# EAGLE board v2_dashbutton_round (EAGLE 9.1.3)
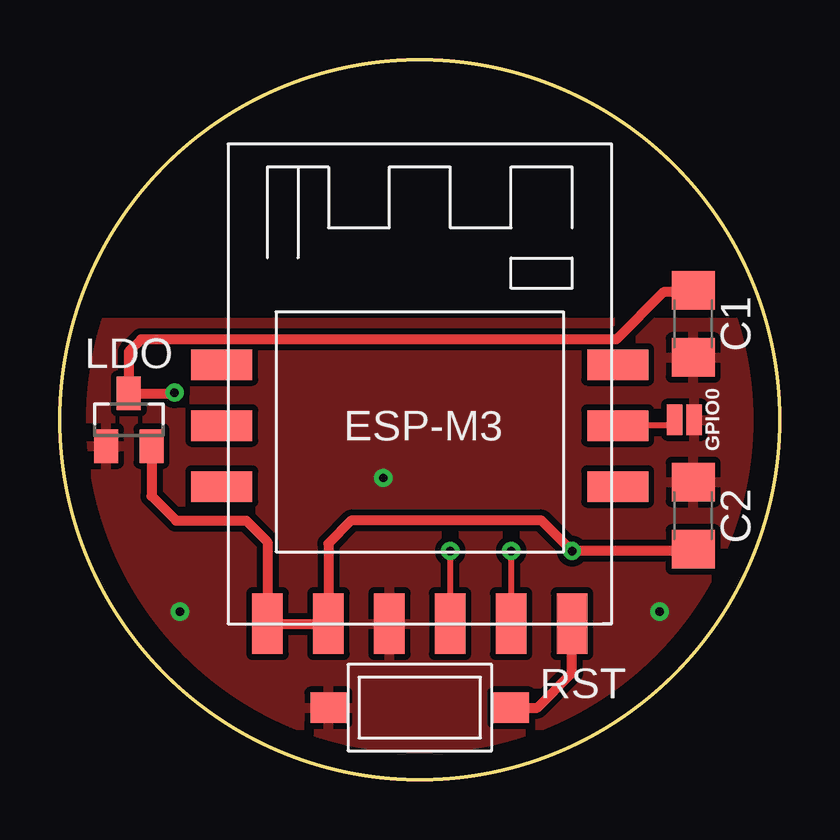
[diagram p0: board, top side]
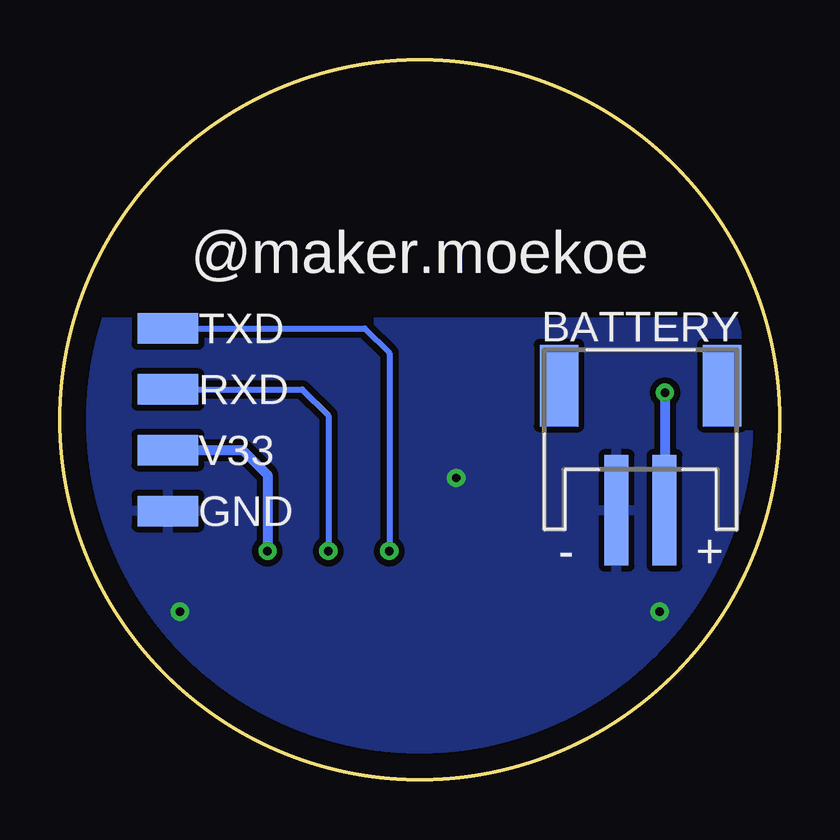
[diagram p1: board, bottom side, seen from below]

Size 30 x 30 mm. Coordinates in mm from the lower left corner, seen from the top.
Outline: circle at 15,15 radius 15
Copper layers (1*16): Top 0.035mm / dielectric 1.5mm / Bottom 0.035mm
Design rules "default": minimum track width 6mil, minimum drill 0.35mm, track to track 6mil, track to pad 6mil, pad to pad 6mil, via to via 6mil, smd to smd 6mil, copper to edge 40mil, drill to drill 6mil, minimum pad ring 10mil, minimum via ring 8mil, stop-mask expansion 4mil, vias tented up to drill 0mil, thermal gap 10mil

## Footprints (pad centres in the part's own frame; a part is rotated, then mirrored left to right if it is on the bottom)
JST-PH-2-SMT-RA = smd 1 x 4.6: 1 1,-3.7; 2 -1,-3.7 | smd 1.6 x 3.4: NC1 -3.4,1.5; NC2 3.4,1.5
C1206 = smd 1.6 x 1.8: 1 -1.4,0; 2 1.4,0
SMD1,27-2,54 = smd 1.27 x 2.54: 1 0,0
SMT-JUMPER_2_NO_NO-SILK = smd 0.635 x 1.27: 1 -0.406,0; 2 0.406,0
SOT23 = smd 1 x 1.4: 1 -0.95,-1.1; 2 0.95,-1.1; 3 0,1.1
6X3BUTTON = smd 1.5 x 1.27: P1 -3.81,0; P2 3.81,0
ESP8285 = smd 1.27 x 2.54: EN -6.35,0; GND -1.27,0; RST 6.35,0; RXD 3.81,0; TXD 1.27,0; VCC -3.81,0 | smd 2.54 x 1.27: GPIO0 8.255,8.255; GPIO2 8.255,5.715; GPIO4 8.255,10.795; GPIO13 -8.255,5.715; GPIO14 -8.255,8.255; GPIO16 -8.255,10.795

## Placement (x,y rotation side)
BATTERY  [JST-PH-2-SMT-RA]  5.79,14.92 0 bottom
C1  1u  [C1206]  26.4,19 270 top
C2  1u  [C1206]  26.4,11 90 top
GND  [SMD1,27-2,54]  25.5,11.19 270 bottom
GPIO0  [SMT-JUMPER_2_NO_NO-SILK]  26.04,15 0 top
LDO  MCP1700  [SOT23]  2.87,15 0 top
RST  6X3_SMD_BUTTON_HALF  [6X3BUTTON]  15,3 180 top
RXD  [SMD1,27-2,54]  25.5,16.27 270 bottom
TXD  [SMD1,27-2,54]  25.5,18.81 270 bottom
U$1  ESP8285-M3  [ESP8285]  15,6.5 0 top
V33  [SMD1,27-2,54]  25.5,13.73 270 bottom

## Library data of the parts
BATTERY = adafruit
C1 C2 = rcl; SPICEPREFIX: C
GND RXD TXD V33 = wirepad
GPIO0 = SparkFun-Jumpers
LDO = linear
RST U$1 = moekoe

## Nets
GND: BATTERY.2 C1.2 C2.2 GND.1 GPIO0.2 LDO.1 RST.P2 U$1.GND
GPIO0: GPIO0.1 U$1.GPIO0
RESET: RST.P1 U$1.RST
RXD: RXD.1 U$1.RXD
TXD: TXD.1 U$1.TXD
V33: C2.1 LDO.2 U$1.EN U$1.VCC V33.1
VCC: BATTERY.1 C1.1 LDO.3

## Tracks (layer width: path | path; a pad name or v marks a point on that pad's centre or on a via)
GND  (via drill 0.35)
  other vias: 5,7 13.48,12.57 25,7
  pour Top (isolate 0.254): -0.88,19.05 30.88,19.05 30.88,-0.64 -0.88,-0.64
  pour Bottom (isolate 0.254): -0.88,19.05 30.88,19.05 30.88,-0.64 -0.88,-0.64
GPIO0
  Top 0.254: GPIO0.1 25.38,14.76 U$1.GPIO0
RESET
  Top 0.406: RST.P1 19.91,3 21.35,4.45 U$1.RST
RXD  (via drill 0.35)
  Top 0.254: v18.81,9.53 U$1.RXD
  Bottom 0.254: RXD.1 19.9,16.27 18.81,15.18 v18.81,9.53
TXD  (via drill 0.35)
  Top 0.254: v16.27,9.53 U$1.TXD
  Bottom 0.254: TXD.1 17.3,18.81 16.27,17.78 v16.27,9.53
V33  (via drill 0.35)
  Top 0.406: 26.32,9.53 C2.1 26.32,9.53 | LDO.2 3.82,11.81 4.84,10.79 7.76,10.79 8.65,9.91 U$1.EN U$1.VCC 11.19,9.84 12.14,10.79 20.08,10.79 v21.35,9.53 26.32,9.53
  Bottom 0.406: V33.1 22.38,13.73 21.35,12.7 v21.35,9.53
VCC  (via drill 0.35)
  Top 0.406: v4.78,16.13 4.75,16.1 LDO.3 2.87,17.84 3.38,18.35 23.19,18.35 25.16,20.32 26.32,20.32 C1.1
  Bottom 0.406: v4.78,16.13 4.78,11.24 BATTERY.1

## Text on the board
bNames: @maker.moekoe